# Altium PCB PCB.PcbDoc (part 10 of 11)
Units mm, origin at the board's own origin, x right, y up, seen from the top; angles counter-clockwise.
Board outline 100.46 x 70.51 mm, 10 copper layers (L1(SIG), L2(GND), L3(PWR), L4(SIG), L5(GND), L6(SIG), L7(GND), L8(SIG), L9(GND), L10(SIG)), stack 1.49 mm thick; 425 components, 324 nets, 2004 pads, 1425 vias.
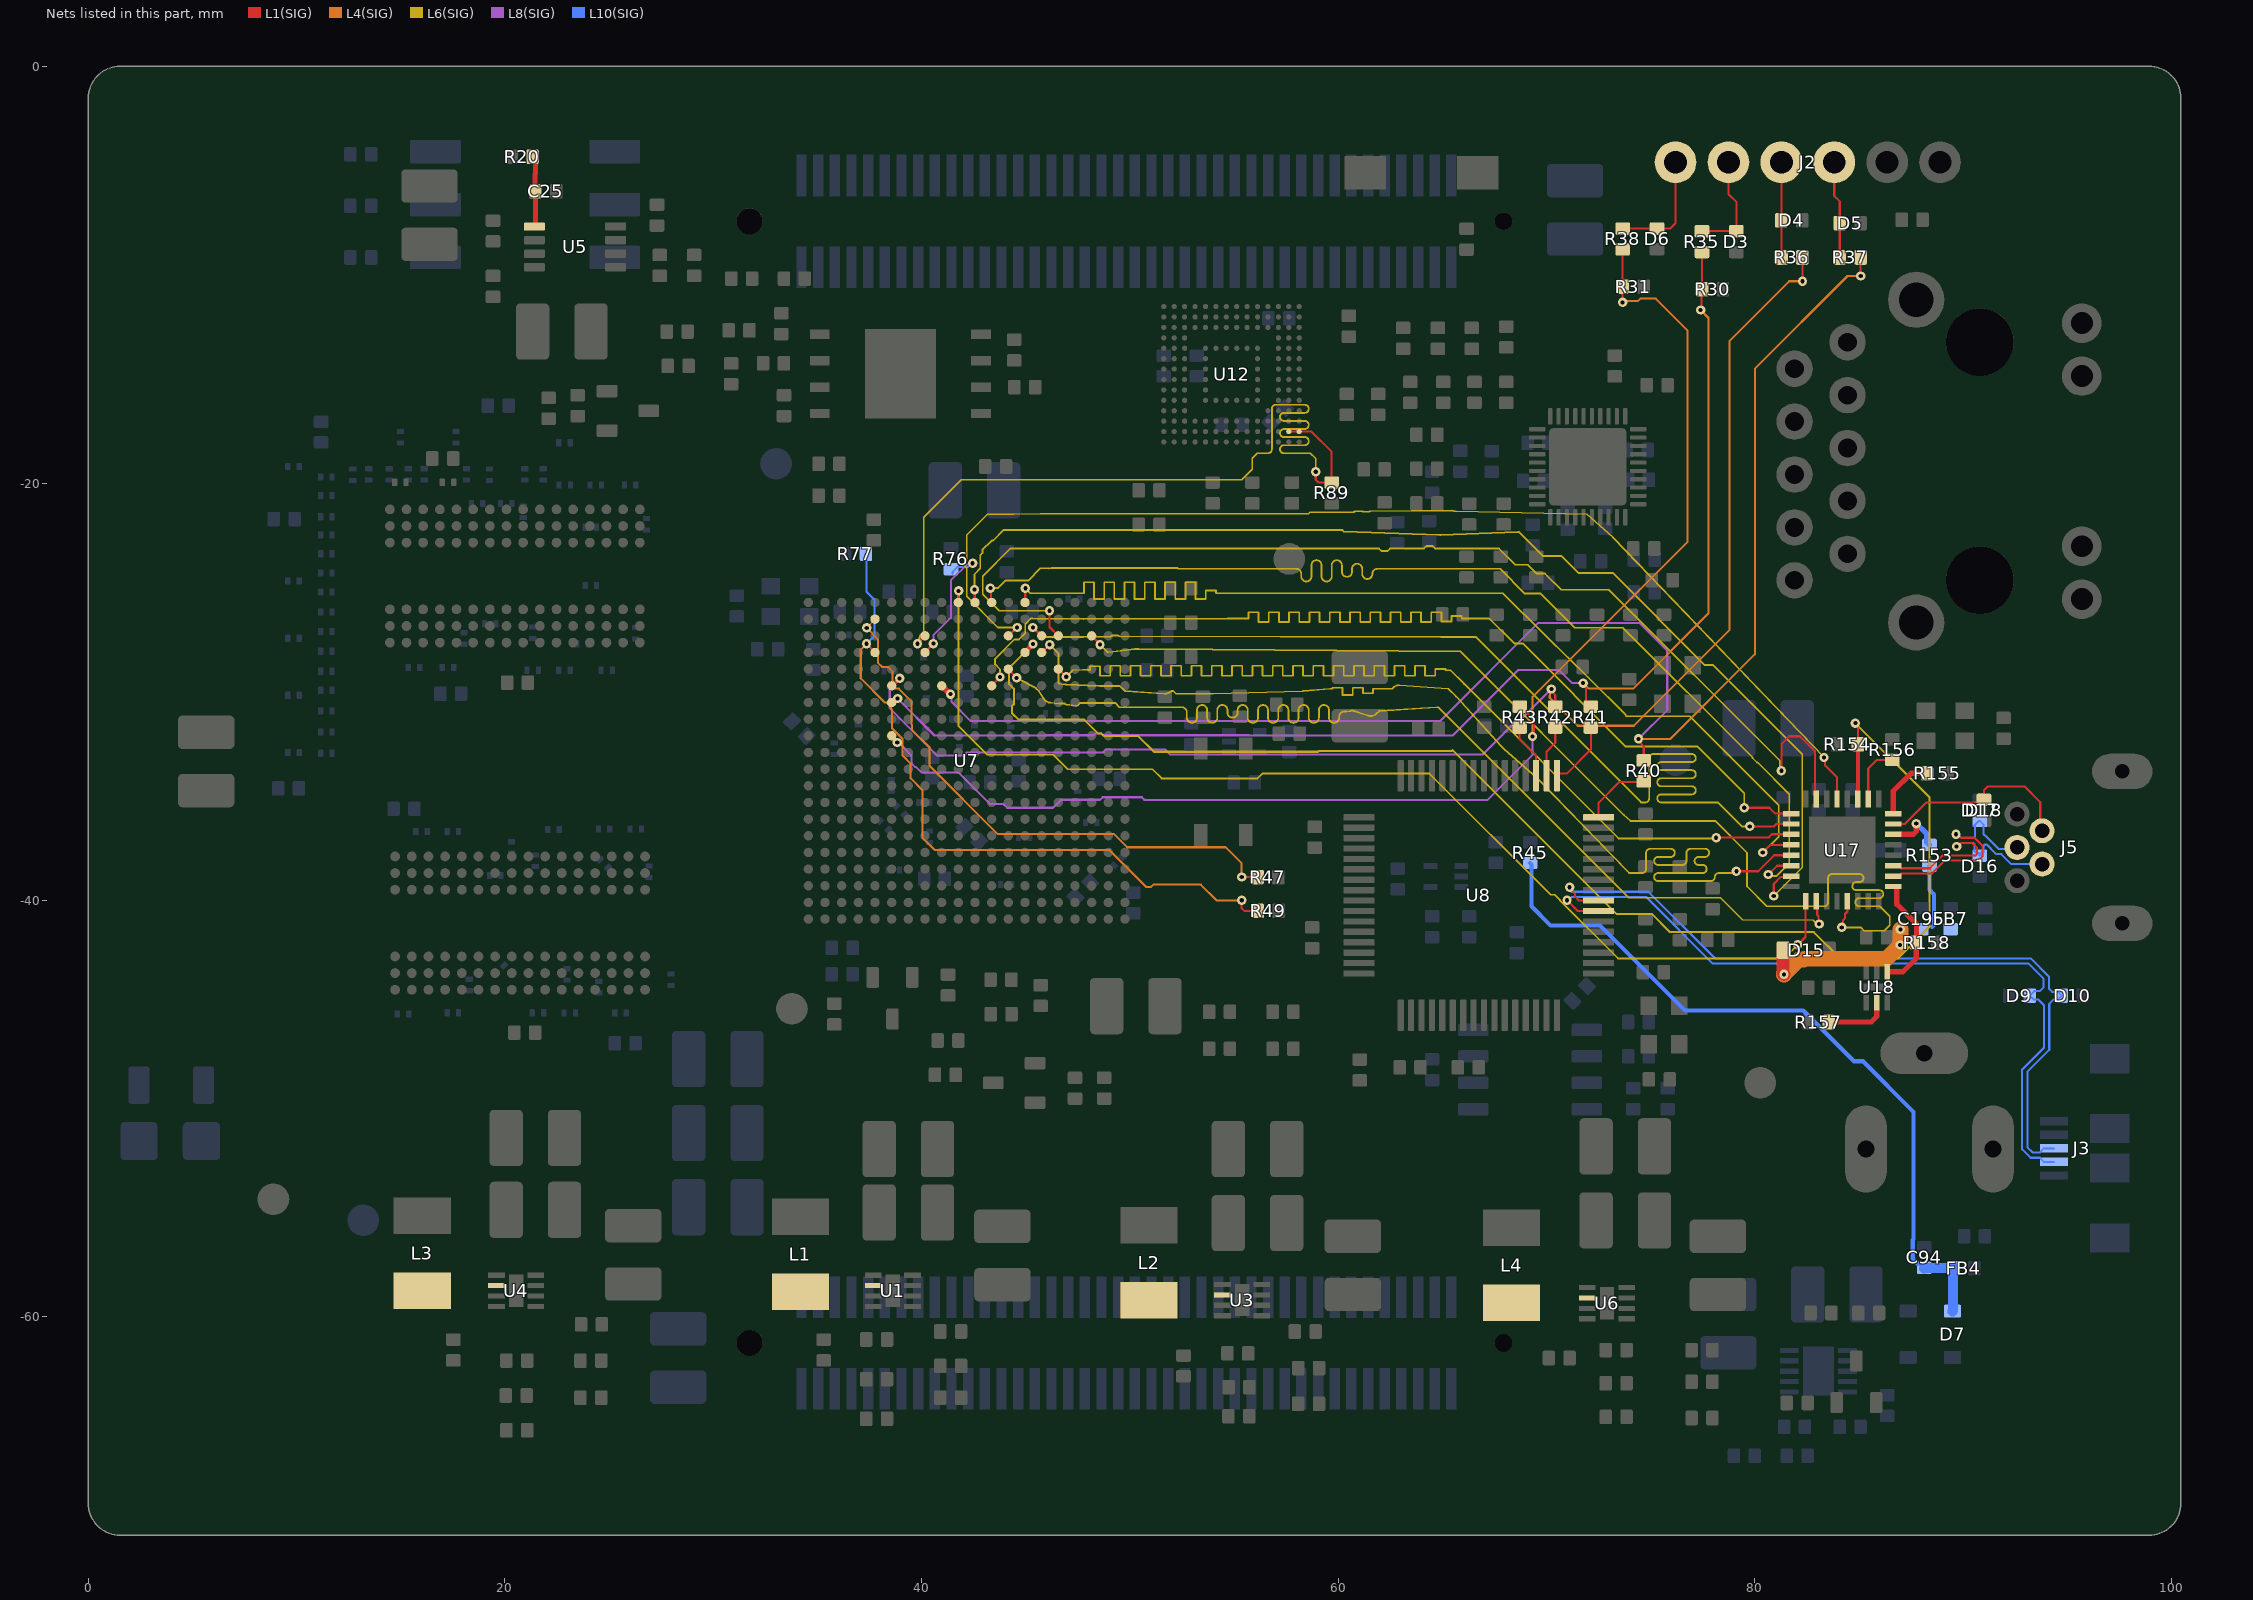
[diagram p17: the nets of this part, all layers, seen from the top]

## Via types
v1: diameter 0.45, hole 0.2, L1(SIG) to L10(SIG), tented both sides, 1194 vias
v2: diameter 0.45, hole 0.2, L1(SIG) to L10(SIG), 211 vias
v3: diameter 0.6, hole 0.25, L1(SIG) to L10(SIG), 9 vias
v4: diameter 0, hole 0.2, L1(SIG) to L10(SIG), tented both sides, 6 vias
v5: diameter 5, hole 3.2, L1(SIG) to L10(SIG), tented both sides, 4 vias
v6: diameter 0.45/0.45/0.45/0.45/0.45/0.45/0.45/0.45/0.45/0.45 (per signal layer), hole 0.2, L1(SIG) to L10(SIG), tented both sides, 1 vias

## Nets (pads, with @x,y where several pads share a name; then routed paths per layer and width w, separated by ;. In a path a pad name is that pad's centre, name@x,y a point inside that pad or via, vN(x,y) a via of type N, cw(c..) or ccw(c..) an arc to the next point about the centre after c; other vN are vias at no path point) (continued)
SD_D3: R89.2 U7.C8 U12.B1 U12.B2 | length 44.7
  L1(SIG) w0.103: v1(39.811,-27.693) 39.811,-27.681 40.17,-27.322 U7.C8@40.17,-27.31 ; U12.B2@57.634,-17.506 58.025,-17.506 U12.B1@58.08,-17.56 ; U12.B1@58.134,-17.506 58.716,-17.506 59.69,-18.479 R89.2@59.69,-19.951 59.063,-19.951 58.928,-19.816 v1(58.928,-19.435)
  L6(SIG) w0.088: v1(39.811,-27.693) 39.954,-27.269 40.111,-27.112 40.111,-21.614 41.91,-19.816 55.372,-19.816 55.88,-19.308 55.88,-18.78 56.114,-18.546 56.585,-18.546 56.629,-18.546 ccw(c56.629,-18.352) 56.823,-18.352 56.823,-16.414 cw(c57.016,-16.414) 57.016,-16.22 58.399,-16.22 cw(c58.399,-16.414) 58.593,-16.414 cw(c58.399,-16.414) 58.399,-16.608 57.404,-16.608 ccw(c57.404,-16.801) 57.21,-16.801 ccw(c57.404,-16.801) 57.404,-16.995 58.399,-16.995 cw(c58.399,-17.189) 58.593,-17.189 cw(c58.399,-17.189) 58.399,-17.383 57.404,-17.383 ccw(c57.404,-17.577) 57.21,-17.577 ccw(c57.404,-17.577) 57.404,-17.77 58.399,-17.77 cw(c58.399,-17.964) 58.593,-17.964 cw(c58.399,-17.964) 58.399,-18.158 57.404,-18.158 ccw(c57.404,-18.352) 57.21,-18.352 ccw(c57.404,-18.352) 57.404,-18.546 58.637,-18.546 58.674,-18.546 58.928,-18.8 v1(58.928,-19.435)
SW_1V0: L1.1 U1.6
SW_1V8: L2.1 U3.6
SW_1V35: L3.1 U4.6
SW_3V3: L4.1 U6.6
TCK: R37.2 R40.2 U7.F9 | length 73
  L1(SIG) w0.1: v1(74.422,-32.258) 74.422,-32.351 74.676,-32.605 R40.2@74.676,-33.294 ; v1@85.086,-10.033 R37.2@85.086,-9.152
  L1(SIG) w0.3: U7.F9@40.973,-29.708 40.979,-29.708 41.381,-30.11 v1(41.393,-30.11) ; R37.2@85.082,-9.148 R37.2@85.086,-9.152 ; v1@85.086,-10.033 v1(85.09,-10.037)
  L4(SIG) w0.1: v1(74.422,-32.258) 74.425,-32.262 75.946,-32.262 80.01,-28.198 80.01,-14.482 84.455,-10.037 v1(85.09,-10.037)
  L8(SIG) w0.1: v1(41.393,-30.11) 41.442,-30.159 41.442,-30.485 42.367,-31.41 64.892,-31.41 69.616,-26.686 74.468,-26.686 75.804,-28.021 75.804,-30.877 v1(74.422,-32.258)
TCK_FTDI: R40.1 U8.16 | length 3.6
  L1(SIG) w0.1: U8.16@72.506,-36.023 72.506,-35.42 72.506,-35.321 73.5,-34.326 74.795,-34.326 R40.1@74.947,-34.175
TCK_JTAG: D5.K J2.4 R37.1 | length 4.7
  L1(SIG) w0.1: J2.4@83.82,-4.576 83.82,-6.195 84.082,-6.457 R37.1@84.082,-9.148
TDI: R30.1 R35.2 R41.2 U7.G6 | length 62.1
  L1(SIG) w0.1: v1(71.765,-29.583) 71.765,-29.678 71.911,-29.824 71.911,-30.487 R41.2@72.136,-30.712 ; v1(77.403,-11.67) 77.44,-11.633 77.44,-10.709 R30.1@77.478,-10.672 77.474,-10.668 77.474,-8.89 R35.2@77.47,-8.886
  L1(SIG) w0.2: U7.G6@38.57,-30.51 38.616,-30.51 38.808,-30.318 v1(38.855,-30.318)
  L4(SIG) w0.1: v1(71.765,-29.583) 72.03,-29.849 74.168,-29.849 77.784,-26.233 77.784,-12.051 v1(77.403,-11.67)
  L8(SIG) w0.1: v1(38.855,-30.318) 38.855,-30.325 40.628,-32.098 45.928,-32.098 45.942,-32.085 48.255,-32.085 48.335,-32.004 48.646,-32.004 48.726,-32.085 55.714,-32.085 55.728,-32.098 65.499,-32.098 68.638,-28.96 70.612,-28.96 71.235,-29.583 v1(71.765,-29.583)
TDI_FTDI: R41.1 U8.17 | length 3.2
  L1(SIG) w0.1: U8.17@70.506,-34.023 70.506,-33.963 70.556,-33.913 70.993,-33.913 72.136,-32.77 R41.1@72.136,-31.712
TDI_JTAG: D3.K J2.2 R35.1 | length 5.1
  L1(SIG) w0.1: R35.1@77.47,-7.886 D3.K@79.121,-7.886 79.121,-6.481 78.74,-6.1 J2.2@78.74,-4.576
TDO: R36.2 R42.2 U7.F6 | length 68.6
  L1(SIG) w0.1: v1(70.24,-29.862) 70.24,-29.956 70.427,-30.143 R42.2@70.427,-30.712 ; v1@82.292,-10.287 R36.2@82.292,-9.152
  L1(SIG) w0.2: U7.F6@38.57,-29.71 38.582,-29.71 38.94,-29.352 v1(38.952,-29.352) ; R36.2@82.288,-9.148 R36.2@82.292,-9.152 ; v1@82.292,-10.287 v1(82.296,-10.291)
  L4(SIG) w0.1: v1(70.24,-29.862) 70.173,-29.929 70.173,-30.174 70.161,-30.187 70.161,-30.287 71.503,-31.628 74.194,-31.628 78.798,-27.024 78.798,-13.153 81.661,-10.291 v1(82.296,-10.291)
  L8(SIG) w0.1: v1(38.952,-29.352) 38.952,-29.392 38.48,-29.864 38.48,-30.784 40.762,-33.066 42.03,-33.066 42.184,-32.912 48.715,-32.912 48.852,-32.776 51.717,-32.776 51.955,-33.014 66.934,-33.014 68.476,-31.471 68.631,-31.471 v1(70.24,-29.862)
TDO_FTDI: R42.1 U8.18 | length 2.5
  L1(SIG) w0.1: U8.18@70.006,-34.023 70.006,-32.868 70.427,-32.446 R42.1@70.427,-31.712
TDO_JTAG: D4.K J2.3 R36.1 | length 4.5
  L1(SIG) w0.1: R36.1@81.28,-8.878 D4.K@81.28,-7.37 J2.3@81.28,-4.576
  L1(SIG) w0.2: R36.1@81.28,-9.132 R36.1@81.423,-9.275
TMS: R31.1 R38.2 R43.2 U7.J6 | length 65.2
  L1(SIG) w0.1: R43.2@68.719,-30.712 68.769,-30.712 69.402,-31.346 69.402,-32.078 v1(69.337,-32.143) ; v1(73.66,-11.303) 73.66,-10.553 R31.1@73.668,-10.545 73.664,-10.541 73.664,-8.763 R38.2@73.66,-8.759
  L1(SIG) w0.2: U7.J6@38.57,-32.11 38.57,-32.135 38.838,-32.403 v1(38.838,-32.429)
  L4(SIG) w0.1: v1(69.337,-32.143) 69.337,-30.235 76.784,-22.787 76.784,-12.657 75.254,-11.126 74.515,-11.126 74.395,-11.246 73.717,-11.246 v1(73.66,-11.303)
  L8(SIG) w0.1: v1(38.838,-32.429) 38.912,-32.429 39.525,-33.042 39.525,-33.398 39.535,-33.408 39.535,-33.452 39.681,-33.598 39.728,-33.598 40.009,-33.88 41.792,-33.88 43.307,-35.394 43.939,-35.394 44.11,-35.565 46.317,-35.565 46.7,-35.182 48.576,-35.182 48.699,-35.06 50.574,-35.06 50.697,-35.182 50.718,-35.182 50.734,-35.198 67.168,-35.198 69.337,-33.029 v1(69.337,-32.143)
TMS_FTDI: R43.1 U8.19 | length 2.6
  L1(SIG) w0.1: R43.1@68.719,-31.712 68.719,-32.273 69.506,-33.06 U8.19@69.506,-34.023
TMS_JTAG: D6.K J2.1 R38.1 | length 5.6
  L1(SIG) w0.1: R38.1@73.66,-7.759 75.938,-7.759 76.2,-7.497 J2.1@76.2,-4.576
UART1_RX: R47.2 U7.B5 | length 27.2
  L1(SIG) w0.1: v1@37.37,-26.921 U7.B5@37.832,-26.459 ; v1(55.372,-38.892) R47.2@56.134,-38.892
  L1(SIG) w0.254: U7.B5@37.832,-26.459 U7.B5@37.847,-26.459
  L4(SIG) w0.1: v1(37.37,-26.932) 37.909,-27.471 37.909,-28.602 38.116,-28.809 38.397,-28.809 38.604,-29.016 38.604,-29.721 38.722,-29.84 38.776,-29.84 38.779,-29.843 38.91,-29.843 39.517,-30.45 39.517,-31.563 39.543,-31.588 39.543,-31.813 40.378,-32.648 40.378,-33.536 43.671,-36.83 49.249,-36.83 49.879,-37.46 54.601,-37.46 55.372,-38.231 v1(55.372,-38.892)
UART1_TX_VCFG1: R49.2 R77.2 U7.D5 | length 33.8
  L1(SIG) w0.1: v1(37.363,-27.694) 37.363,-27.698 37.77,-28.106 U7.D5@37.77,-28.11 ; v1(55.372,-40.009) 55.372,-40.39 55.499,-40.517 R49.2@56.142,-40.517
  L4(SIG) w0.1: v1(37.363,-27.694) 37.084,-27.973 37.084,-29.356 38.24,-30.512 38.325,-30.512 38.545,-30.732 38.545,-30.817 38.588,-30.86 38.588,-31.75 39.088,-32.25 39.088,-33.051 39.482,-33.445 39.482,-34.152 40.049,-34.72 40.049,-37.005 40.636,-37.592 49.022,-37.592 50.798,-39.368 51.016,-39.368 51.131,-39.253 53.41,-39.253 54.166,-40.009 v1(55.372,-40.009)
  L10(SIG) w0.1: R77.2@37.33,-23.372 37.37,-23.412 37.37,-25.205 37.745,-25.58 37.745,-27.312 v1@37.363,-27.694
USB_CLK: U7.F12 U17.1 | length 54.7
  L1(SIG) w0.103: U7.F12@43.37,-29.71 43.37,-29.698 43.77,-29.298 v1(43.77,-29.287) ; v1(79.502,-35.564) 80.697,-35.564 80.979,-35.846 U17.1@81.751,-35.846
  L6(SIG) w0.088: v1(43.77,-29.287) 43.77,-28.916 43.537,-28.684 43.537,-28.411 44.46,-27.488 44.679,-27.488 44.979,-27.189 44.979,-26.757 45.231,-26.504 45.257,-26.478 45.33,-26.478 47.767,-26.501 ccw(c47.77,-26.132) 47.771,-26.501 54.687,-26.478 ; 54.689,-26.478 55.653,-26.478 55.697,-26.478 55.697,-26.183 56.185,-26.183 56.185,-26.653 56.672,-26.653 56.672,-26.183 57.16,-26.183 57.16,-26.653 57.647,-26.653 57.647,-26.183 58.135,-26.183 58.135,-26.653 58.623,-26.653 58.623,-26.183 59.11,-26.183 59.11,-26.653 59.598,-26.653 59.598,-26.183 60.085,-26.183 60.085,-26.653 60.573,-26.653 60.573,-26.183 61.061,-26.183 61.061,-26.653 61.548,-26.653 61.548,-26.183 62.036,-26.183 62.036,-26.653 62.523,-26.653 62.523,-26.183 63.011,-26.183 63.011,-26.653 63.498,-26.653 63.498,-26.183 63.986,-26.183 63.986,-26.653 64.474,-26.653 64.474,-26.183 64.961,-26.183 64.961,-26.626 65.449,-26.626 65.449,-26.352 65.936,-26.352 65.936,-26.478 66.428,-26.478 67.256,-26.478 68.455,-27.677 68.858,-27.677 73.807,-32.627 77.262,-32.627 79.502,-34.867 v1(79.502,-35.564)
USB_DATA0: U7.E16 U17.3 | length 55.4
  L1(SIG) w0.103: U7.E16@46.57,-28.91 46.575,-28.91 46.945,-29.279 v1(46.95,-29.279) ; v1(78.147,-37.004) 78.161,-36.99 80.673,-36.99 80.823,-36.84 81.745,-36.84 U17.3@81.751,-36.846
  L6(SIG) w0.088: v1(46.95,-29.279) 46.95,-29.264 47.229,-28.985 47.254,-28.96 47.739,-28.944 cw(c47.752,-29.312) 47.758,-28.943 47.989,-28.947 48.033,-28.948 48.084,-28.948 48.084,-28.77 48.572,-28.77 48.572,-29.23 49.059,-29.23 49.059,-28.746 49.547,-28.746 49.547,-29.23 50.035,-29.23 50.035,-28.746 50.522,-28.746 50.522,-29.23 51.01,-29.23 51.01,-28.746 51.497,-28.746 51.497,-29.23 51.985,-29.23 51.985,-28.746 52.472,-28.746 52.472,-29.23 52.96,-29.23 52.96,-28.746 53.448,-28.746 53.448,-29.23 53.935,-29.23 53.935,-28.746 54.423,-28.746 54.423,-29.23 54.91,-29.23 54.91,-28.746 55.398,-28.746 55.398,-29.23 55.886,-29.23 55.886,-28.746 56.373,-28.746 56.373,-29.23 56.861,-29.23 56.861,-28.746 57.348,-28.746 57.348,-29.23 57.836,-29.23 57.836,-28.746 58.323,-28.746 58.323,-29.23 58.811,-29.23 58.811,-28.746 59.299,-28.746 59.299,-29.23 59.786,-29.23 59.786,-28.746 60.274,-28.746 60.274,-29.23 60.761,-29.23 60.761,-28.746 61.249,-28.746 61.249,-29.23 61.737,-29.23 61.737,-28.746 62.224,-28.746 62.224,-29.23 62.712,-29.23 62.712,-28.746 63.199,-28.746 63.199,-29.23 63.687,-29.23 63.687,-28.746 64.174,-28.746 64.174,-29.23 64.662,-29.23 64.662,-28.906 65.15,-28.906 65.15,-28.965 65.352,-28.965 65.396,-28.965 66.049,-29.618 ; 66.05,-29.619 73.47,-37.039 73.79,-37.039 73.825,-37.039 78.112,-37.039 v1(78.147,-37.004)
USB_DATA1: U7.A14 U17.4 | length 55.2
  L1(SIG) w0.103: U7.A14@44.97,-25.71 44.979,-25.7 44.979,-25.036 v1(44.988,-25.027) ; v1(80.391,-37.713) 80.759,-37.346 U17.4@81.751,-37.346
  L6(SIG) w0.088: v1(44.988,-25.027) 45.23,-25.268 47.752,-25.268 47.796,-25.268 47.796,-24.741 48.283,-24.741 48.283,-25.541 48.771,-25.541 48.771,-24.741 49.259,-24.741 49.259,-25.541 49.746,-25.541 49.746,-24.741 50.234,-24.741 50.234,-25.541 50.721,-25.541 50.721,-24.741 51.209,-24.741 51.209,-25.541 51.696,-25.541 51.696,-24.741 52.184,-24.741 52.184,-25.541 52.672,-25.541 52.672,-24.741 53.159,-24.741 53.159,-25.541 53.647,-25.541 53.647,-25.129 54.134,-25.129 54.134,-25.268 56.022,-25.268 67.907,-25.268 69.996,-27.336 72.023,-29.319 73.811,-31.107 73.811,-31.172 73.847,-31.172 76.888,-31.172 81.153,-35.437 81.153,-36.961 80.4,-37.713 v1(80.391,-37.713)
USB_DATA2: U7.D15 U17.5 | length 54.9
  L1(SIG) w0.103: U7.D15@45.77,-28.11 45.772,-28.11 46.15,-27.732 v1(46.152,-27.732) ; v1(79.121,-38.612) 80.175,-38.612 80.939,-37.848 81.749,-37.848 U17.5@81.751,-37.846
  L6(SIG) w0.088: v1(46.152,-27.732) 46.572,-28.152 46.572,-29.521 46.572,-29.558 46.623,-29.609 46.902,-29.645 ccw(c46.95,-29.279) 46.914,-29.646 ccw(c46.95,-29.279) 46.934,-29.648 48.557,-29.718 ccw(c48.561,-29.631) 48.561,-29.718 cw(c48.57,-30.087) 48.579,-29.718 cw(c48.57,-30.087) 48.622,-29.722 48.626,-29.718 49.523,-29.718 49.738,-29.934 49.764,-29.959 51.664,-30.09 ccw(c51.689,-29.722) 51.873,-30.041 52.015,-29.959 52.088,-29.959 52.219,-30.09 53.973,-30.09 54.01,-30.09 58.283,-29.968 cw(c58.285,-30.055) 58.286,-29.968 ; 58.286,-29.968 ccw(c58.293,-29.599) 58.29,-29.968 ccw(c58.293,-29.599) 58.327,-29.966 59.614,-29.849 59.687,-29.849 59.731,-29.849 59.731,-29.8 60.218,-29.8 60.218,-30.151 60.706,-30.151 60.706,-29.8 61.194,-29.8 61.194,-30.071 61.681,-30.071 61.681,-29.849 62.608,-29.849 cw(c62.917,-30.05) 62.944,-29.682 65.292,-29.849 65.666,-30.223 cw(c65.405,-30.484) 65.669,-30.226 67.828,-32.613 67.971,-32.756 69.535,-34.128 69.536,-34.129 73.933,-38.648 73.984,-38.699 74.02,-38.699 74.549,-38.699 74.593,-38.699 ccw(c74.593,-38.505) 74.787,-38.505 74.787,-37.73 cw(c74.98,-37.73) 74.98,-37.536 75.97,-37.536 cw(c75.97,-37.73) 76.164,-37.73 cw(c75.97,-37.73) 75.97,-37.924 75.368,-37.924 ccw(c75.368,-38.117) 75.174,-38.117 ccw(c75.368,-38.117) 75.368,-38.311 76.531,-38.311 ccw(c76.531,-38.117) 76.725,-38.117 76.725,-37.73 cw(c76.918,-37.73) 76.918,-37.536 77.621,-37.536 cw(c77.621,-37.73) 77.815,-37.73 cw(c77.621,-37.73) 77.621,-37.924 77.306,-37.924 ccw(c77.306,-38.117) 77.112,-38.117 ccw(c77.306,-38.117) 77.306,-38.311 77.503,-38.311 cw(c77.503,-38.505) 77.696,-38.505 cw(c77.503,-38.505) 77.503,-38.699 75.368,-38.699 ccw(c75.368,-38.892) 75.174,-38.892 ccw(c75.368,-38.892) 75.368,-39.086 77.89,-39.086 ccw(c77.89,-38.892) 78.084,-38.892 cw(c78.278,-38.892) 78.278,-38.699 78.322,-38.699 78.888,-38.699 78.906,-38.681 79.052,-38.681 v1(79.121,-38.612)
USB_DATA3: U7.A12 U17.6 | length 54.6
  L1(SIG) w0.103: v1(43.307,-25.023) 43.339,-25.054 43.339,-25.678 U7.A12@43.37,-25.71 ; v1(80.654,-38.769) 81.077,-38.346 U17.6@81.751,-38.346
  L6(SIG) w0.088: v1(43.307,-25.023) 43.664,-25.023 44.028,-24.658 45.121,-24.658 45.712,-24.068 46.178,-24.068 ; 46.107,-24.079 46.178,-24.068 ; v1(80.654,-38.769) 80.723,-38.838 81.054,-38.838 81.661,-38.231 81.661,-34.915 80.138,-33.392 80.111,-33.392 79.895,-33.176 79.895,-33.149 73.67,-26.924 71.371,-26.924 69.731,-25.284 68.969,-25.284 67.777,-24.092 64.65,-24.092 61.89,-24.092 ccw(c61.89,-24.336) 61.646,-24.336 cw(c61.402,-24.336) 61.402,-24.58 cw(c61.402,-24.336) 61.158,-24.336 61.158,-24.092 ccw(c60.915,-24.092) 60.915,-23.848 ccw(c60.915,-24.092) 60.671,-24.092 60.671,-24.235 cw(c60.427,-24.235) 60.427,-24.478 cw(c60.427,-24.235) 60.183,-24.235 60.183,-23.921 ccw(c59.939,-23.921) 59.939,-23.677 ccw(c59.939,-23.921) 59.696,-23.921 59.696,-24.457 cw(c59.452,-24.457) 59.452,-24.701 cw(c59.452,-24.457) 59.208,-24.457 59.208,-23.921 ccw(c58.964,-23.921) 58.964,-23.677 ccw(c58.964,-23.921) 58.72,-23.921 58.72,-24.457 cw(c58.477,-24.457) 58.477,-24.701 cw(c58.477,-24.457) 58.233,-24.457 58.233,-24.336 ccw(c57.989,-24.336) 57.989,-24.092 57.458,-24.092 52.335,-24.092 52.291,-24.047 46.332,-24.047 46.275,-24.047 46.25,-24.056 46.178,-24.068
USB_DATA4: U7.A11 U17.7 | length 55.9
  L1(SIG) w0.103: v1(42.545,-25.093) 42.557,-25.105 42.557,-25.697 U7.A11@42.57,-25.71 ; v1(80.916,-39.802) 80.916,-39.223 81.256,-38.883 81.713,-38.883 U17.7@81.751,-38.846
  L6(SIG) w0.088: v1(42.545,-25.093) 42.545,-24.355 42.823,-24.077 42.823,-23.438 42.927,-23.335 42.927,-23.181 43.371,-22.737 43.434,-22.737 43.952,-22.219 43.962,-22.229 60.198,-22.229 60.274,-22.305 64.884,-22.47 ccw(c64.897,-22.102) 64.911,-22.47 68.623,-22.33 68.695,-22.33 69.85,-23.485 70.734,-23.485 71.54,-24.291 73.182,-24.291 77.609,-28.717 78.003,-28.717 82.286,-33 82.286,-38.432 v1(80.916,-39.802)
USB_DATA5: U7.A10 U17.9 | length 54.7
  L1(SIG) w0.103: U7.A10@41.77,-25.71 41.776,-25.703 41.776,-25.159 v1(41.783,-25.152) ; v1(82.065,-42.138) 82.069,-42.138 82.437,-41.77 82.437,-40.06 U17.9@82.451,-40.046
  L6(SIG) w0.088: v1(41.783,-25.152) 41.783,-31.656 43.15,-33.023 46.335,-33.023 47.03,-33.718 51.09,-33.718 51.526,-34.154 56.133,-34.154 56.362,-33.925 64.389,-33.925 70.209,-39.744 70.406,-39.744 70.649,-39.988 70.649,-40.009 73.442,-42.803 81.404,-42.803 82.065,-42.142 v1(82.065,-42.138)
USB_DATA6: U7.E13 U17.10 | length 54.8
  L1(SIG) w0.103: U7.E13@44.17,-28.91 44.17,-28.921 44.57,-29.321 v1(44.57,-29.332) ; U17.10@82.951,-40.046 83.006,-40.101 83.006,-40.712 83.058,-40.764 83.058,-41.11 v1(83.092,-41.144)
  L6(SIG) w0.088: v1(44.57,-29.332) 45.493,-29.818 45.636,-29.961 45.925,-30.404 ccw(c45.992,-30.348) 45.93,-30.41 45.934,-30.414 ccw(c46.162,-30.124) 45.998,-30.454 46.109,-30.51 ccw(c46.148,-30.431) 46.148,-30.519 46.15,-30.519 cw(c46.17,-30.887) 46.214,-30.521 46.605,-30.568 ; 46.606,-30.568 ccw(c46.616,-30.481) 46.667,-30.552 46.868,-30.552 46.901,-30.585 ccw(c46.963,-30.523) 46.951,-30.61 ; 46.952,-30.61 47.419,-30.666 47.488,-30.666 47.513,-30.64 47.624,-30.53 49.295,-30.53 49.503,-30.738 50.235,-30.738 52.495,-30.738 cw(c52.495,-30.981) 52.739,-30.981 52.739,-31.245 ccw(c52.983,-31.245) 52.983,-31.489 ccw(c52.983,-31.245) 53.227,-31.245 53.227,-30.877 cw(c53.471,-30.877) 53.471,-30.633 cw(c53.471,-30.877) 53.714,-30.877 53.714,-31.245 ccw(c53.958,-31.245) 53.958,-31.489 ccw(c53.958,-31.245) 54.202,-31.245 54.202,-30.877 cw(c54.446,-30.877) 54.446,-30.633 cw(c54.446,-30.877) 54.69,-30.877 54.69,-30.996 ccw(c54.933,-30.996) 54.933,-31.239 ccw(c54.933,-30.996) 55.177,-30.996 55.177,-30.877 cw(c55.421,-30.877) 55.421,-30.633 cw(c55.421,-30.877) 55.665,-30.877 55.665,-31.245 ccw(c55.908,-31.245) 55.908,-31.489 ccw(c55.908,-31.245) 56.152,-31.245 56.152,-30.877 cw(c56.396,-30.877) 56.396,-30.633 cw(c56.396,-30.877) 56.64,-30.877 56.64,-31.245 ccw(c56.884,-31.245) 56.884,-31.489 ccw(c56.884,-31.245) 57.127,-31.245 57.127,-30.877 cw(c57.371,-30.877) 57.371,-30.633 cw(c57.371,-30.877) 57.615,-30.877 57.615,-31.245 ccw(c57.859,-31.245) 57.859,-31.489 ccw(c57.859,-31.245) 58.103,-31.245 58.103,-30.877 cw(c58.346,-30.877) 58.346,-30.633 cw(c58.346,-30.877) 58.59,-30.877 58.59,-31.245 ccw(c58.834,-31.245) 58.834,-31.489 ccw(c58.834,-31.245) 59.078,-31.245 59.078,-30.877 cw(c59.322,-30.877) 59.322,-30.633 cw(c59.322,-30.877) 59.565,-30.877 59.565,-31.245 ccw(c59.809,-31.245) 59.809,-31.489 ccw(c59.809,-31.245) 60.053,-31.245 60.053,-31.187 cw(c60.297,-31.187) 60.314,-30.944 60.414,-30.951 60.591,-30.92 60.645,-30.896 60.696,-30.896 61.394,-31.128 61.438,-31.142 61.451,-31.147 ccw(c61.568,-30.797) 61.824,-31.062 61.967,-30.924 ccw(c61.951,-30.555) 61.976,-30.923 64.736,-30.738 64.804,-30.738 73.948,-39.882 78.359,-39.882 79.39,-40.913 79.416,-40.938 82.813,-40.964 82.994,-41.144 v1(83.092,-41.144)
USB_DATA7: U7.C18 U17.13 | length 55.2
  L1(SIG) w0.103: U7.C18@48.17,-27.31 48.17,-27.321 48.57,-27.721 v1(48.57,-27.732) ; v1(84.18,-41.308) 84.246,-41.242 84.246,-40.964 84.334,-40.877 84.334,-40.668 84.453,-40.549 84.453,-40.048 U17.13@84.451,-40.046
  L6(SIG) w0.088: v1(48.57,-27.732) 48.916,-28.078 48.941,-28.103 48.989,-28.103 50.258,-27.95 cw(c50.302,-28.316) 50.312,-27.947 50.388,-27.949 cw(c50.428,-28.316) 50.43,-27.947 53.973,-27.97 65.878,-28.071 65.904,-28.096 73.72,-35.912 74.041,-36.199 74.077,-36.199 78.105,-36.199 79.632,-37.725 79.632,-39.342 80.584,-40.294 83.286,-40.294 83.33,-40.294 ccw(c83.33,-40.101) 83.523,-40.101 83.523,-38.938 cw(c83.717,-38.938) 83.717,-38.744 85.033,-38.744 cw(c85.033,-38.938) 85.227,-38.938 cw(c85.033,-38.938) 85.033,-39.132 84.88,-39.132 ccw(c84.88,-39.326) 84.686,-39.326 ccw(c84.88,-39.326) 84.88,-39.519 85.978,-39.519 cw(c85.978,-39.713) 86.171,-39.713 cw(c85.978,-39.713) 85.978,-39.907 85.026,-39.907 ccw(c85.026,-40.101) 84.832,-40.101 ccw(c85.026,-40.101) 85.026,-40.294 85.931,-40.294 cw(c85.931,-40.488) 86.067,-40.35 86.102,-40.386 86.133,-40.417 86.487,-40.771 86.487,-41.212 86.228,-41.471 85.249,-41.471 85.087,-41.308 v1(84.18,-41.308)
USB_DIR: U7.C16 U17.31 | length 55.2
  L1(SIG) w0.103: v1(46.147,-26.11) 46.147,-26.887 U7.C16@46.57,-27.31 ; v1(81.28,-33.786) 81.28,-32.516 81.661,-32.135 82.169,-32.135 82.901,-32.867 82.901,-35.096 U17.31@82.951,-35.146
  L6(SIG) w0.088: v1(46.147,-26.11) 43.729,-26.11 42.938,-25.319 42.938,-24.441 44.261,-23.118 61.962,-23.118 62.077,-23.232 62.383,-23.232 62.498,-23.118 64.121,-23.118 64.236,-23.003 64.542,-23.003 64.657,-23.118 67.719,-23.118 68.502,-23.9 69.11,-23.9 69.535,-24.326 69.933,-24.326 70.704,-25.097 72.998,-25.097 81.223,-33.322 81.223,-33.728 v1(81.28,-33.786)
USB_FTDI_D_N: D9.K J3.2 U8.7 | length 37.6
  L1(SIG) w0.1: v1(70.993,-40.009) 71.507,-40.523 72.467,-40.523 U8.7@72.506,-40.523 U8.7@72.467,-40.484
  L10(SIG) w0.1: v1(70.993,-40.009) 71.065,-40.009 71.227,-39.847 74.794,-39.847 77.994,-43.047 93.152,-43.047 93.874,-43.77 93.874,-44.176 93.681,-44.369 93.422,-44.369 D9.K@93.21,-44.581 93.398,-44.768 93.614,-44.768 93.891,-45.046 93.891,-47.082 92.841,-48.133 92.841,-51.962 93.246,-52.367 93.686,-52.367 93.886,-52.567 J3.2@94.361,-52.567
USB_FTDI_D_P: D10.K J3.3 U8.8 | length 37.5
  L1(SIG) w0.1: v1(71.114,-39.382) 71.114,-39.452 71.38,-39.717 71.38,-39.835 71.567,-40.023 U8.8@72.506,-40.023
  L10(SIG) w0.1: v1(71.114,-39.382) 71.114,-39.477 71.213,-39.576 71.213,-39.597 74.897,-39.597 78.097,-42.797 93.255,-42.797 94.124,-43.666 94.124,-44.244 94.28,-44.4 94.569,-44.4 D10.K@94.75,-44.581 94.567,-44.763 94.359,-44.763 94.141,-44.981 94.141,-47.186 93.091,-48.236 93.091,-51.858 93.35,-52.117 93.686,-52.117 93.886,-51.917 J3.3@94.361,-51.917
USB_HS_CPEN: R158.1 U17.17 U18.4 | length 5.7
  L1(SIG) w0.254: U18.4@86.36,-43.438 87.122,-43.438 87.757,-42.803 87.757,-42.049 R158.1@87.765,-42.041 87.765,-41.14 86.824,-40.199 86.824,-39.349 86.821,-39.346 U17.17@86.651,-39.346
USB_HS_D_N: D16.K J5.2 U17.19 | length 11.4
  L1(SIG) w0.1: U17.19@86.651,-38.346 86.921,-38.346 87.046,-38.471 88.404,-38.471 89.025,-37.85 90.619,-37.85 90.678,-37.791 90.678,-37.483 90.449,-37.254 89.93,-37.254 89.759,-37.424 v1(89.696,-37.424)
  L10(SIG) w0.1: v1@89.661,-37.458 89.735,-37.458 89.93,-37.263 90.496,-37.263 90.555,-37.322 90.555,-37.618 90.52,-37.618 90.647,-37.744 90.805,-37.744 D16.K@90.805,-37.866 90.983,-37.687 90.983,-37.398 91.055,-37.326 91.138,-37.326 91.603,-37.791 91.836,-37.791 92.314,-38.269 J5.2@93.798,-38.269
USB_HS_D_P: D17.K J5.3 U17.18 | length 11.5
  L1(SIG) w0.1: U17.18@86.651,-38.846 86.921,-38.846 87.046,-38.721 88.508,-38.721 89.129,-38.1 90.723,-38.1 90.928,-37.895 90.928,-37.38 90.553,-37.004 89.896,-37.004 89.725,-36.834 v1(89.662,-36.834)
  L10(SIG) w0.1: v1@89.767,-36.828 89.767,-36.87 89.91,-37.013 90.521,-37.013 90.58,-36.955 90.58,-36.439 90.52,-36.439 90.769,-36.191 D17.K@90.805,-36.191 90.979,-36.364 90.979,-36.826 91.05,-36.897 91.063,-36.897 91.707,-37.541 92.448,-37.541 92.598,-37.691 J5.3@92.598,-37.469
USB_HS_ID: D18.K J5.4 U17.23 | length 10
  L1(SIG) w0.1: U17.23@86.651,-36.346 87.207,-36.346 88.243,-35.31 91.186,-35.31 D18.K@91.215,-35.339 ; D18.K@91.007,-35.187 91.007,-34.723 91.186,-34.544 92.96,-34.544 93.709,-35.292 93.709,-36.579 J5.4@93.798,-36.669
USB_HS_VBUS_FLT: C195.2 D15.K FB7.1 R153.2 | length 11.2
  L1(SIG) w0.635: D15.K@81.36,-42.4 81.36,-43.517 v1(81.407,-43.565)
  L4(SIG) w0.762: v1(81.407,-43.565) 82.128,-42.844 82.357,-42.844 82.39,-42.811 86.326,-42.811 v1(86.981,-42.156) 86.981,-42.015 86.995,-42.002 v1(86.995,-41.406)
  L10(SIG) w0.2: R153.2@88.392,-38.35 88.392,-39.501 88.612,-39.72 88.612,-41.186 88.519,-41.279
USB_ILIM: R157.1 U18.2 | length 3.1
  L1(SIG) w0.254: R157.1@83.558,-45.851 85.598,-45.851 85.858,-45.591 85.858,-44.92 U18.2@85.86,-44.918
USB_NRST: R154.2 U7.D14 U17.27 | length 69.2
  L1(SIG) w0.1: v1(84.836,-31.5) 84.836,-31.594 84.963,-31.721 84.963,-32.508 R154.2@84.955,-32.516
  L1(SIG) w0.2: R154.2@84.953,-32.641 84.953,-35.144 U17.27@84.951,-35.146 84.951,-34.929 U17.27@84.957,-34.923
  L1(SIG) w0.254: U7.D14@44.97,-28.11 44.97,-28.098 45.353,-27.715 v1(45.353,-27.704)
  L6(SIG) w0.1: v1(45.353,-27.704) 44.195,-28.862 44.195,-29.608 44.436,-29.849 44.436,-30.595 44.343,-30.689 44.343,-31.013 44.664,-31.335 47.819,-31.335 48.488,-32.004 48.646,-32.004 48.767,-32.125 50.413,-32.125 51.166,-32.878 59.039,-32.878 59.075,-32.841 65.46,-32.841 65.502,-32.8 73.358,-40.656 75.057,-40.656 75.936,-41.535 82.838,-41.535 84.106,-42.803 86.868,-42.803 88.392,-41.279 88.392,-35.056 v1(84.836,-31.5)
USB_NXT: U7.C15 U17.2 | length 55.6
  L1(SIG) w0.103: v1(45.349,-26.911) 45.36,-26.911 45.759,-27.31 U7.C15@45.77,-27.31 U7.C15@45.799,-27.281 ; v1(79.766,-36.461) 79.772,-36.467 80.908,-36.467 81.029,-36.346 U17.2@81.751,-36.346
  L6(SIG) w0.088: v1(45.349,-26.911) 45.801,-27.363 47.751,-27.363 49.071,-27.339 ccw(c49.07,-27.251) 49.132,-27.313 49.145,-27.299 49.451,-27.299 49.485,-27.333 64.946,-27.363 ; 64.947,-27.363 66.603,-27.363 74.549,-35.31 74.698,-35.31 74.742,-35.31 ccw(c74.742,-35.116) 74.936,-35.116 74.936,-33.178 cw(c75.13,-33.178) 75.13,-32.984 76.978,-32.984 cw(c76.978,-33.178) 77.172,-33.178 cw(c76.978,-33.178) 76.978,-33.372 75.517,-33.372 ccw(c75.517,-33.565) 75.324,-33.565 ccw(c75.517,-33.565) 75.517,-33.759 76.978,-33.759 cw(c76.978,-33.953) 77.172,-33.953 cw(c76.978,-33.953) 76.978,-34.147 75.517,-34.147 ccw(c75.517,-34.341) 75.324,-34.341 ccw(c75.517,-34.341) 75.517,-34.534 76.978,-34.534 cw(c76.978,-34.728) 77.172,-34.728 cw(c76.978,-34.728) 76.978,-34.922 75.517,-34.922 ccw(c75.517,-35.116) 75.324,-35.116 ccw(c75.517,-35.116) 75.517,-35.31 77.216,-35.31 78.232,-35.31 79.383,-36.461 v1(79.766,-36.461)
USB_PHY_RBIAS: R155.1 U17.24 | length 3.1
  L1(SIG) w0.254: U17.24@86.651,-35.846 86.651,-34.765 87.503,-33.913 R155.1@88.273,-33.913
USB_PHY_VBUS: R153.1 U17.22 | length 2.8
  L1(SIG) w0.254: U17.22@86.651,-36.846 86.654,-36.843 87.608,-36.843 87.757,-36.694 v1(87.757,-36.326)
  L10(SIG) w0.254: v1(87.757,-36.326) 88.265,-36.834 88.265,-37.223 R153.1@88.392,-37.35
USB_REFCLK_13MHz: R156.1 U17.26 | length 2.8
  L1(SIG) w0.1: U17.26@85.451,-35.146 85.451,-33.679 85.86,-33.27 R156.1@86.614,-33.27
USB_STP: U7.C13 U17.29 | length 55.4
  L1(SIG) w0.103: U7.C13@44.17,-27.31 44.181,-27.31 44.578,-26.912 v1(44.59,-26.912) ; v1(83.33,-33.151) 83.378,-33.199 83.378,-33.531 83.951,-34.104 U17.29@83.951,-35.146
  L6(SIG) w0.088: v1(44.59,-26.912) 43.673,-26.912 42.176,-25.416 42.176,-24.067 42.085,-23.976 42.085,-23.671 42.176,-23.58 42.176,-22.47 43.159,-21.487 45.72,-21.449 58.577,-21.449 58.636,-21.391 60.748,-21.373 60.768,-21.354 ; 60.768,-21.354 cw(c60.823,-21.422) 60.797,-21.338 cw(c60.824,-21.422) 60.821,-21.334 61.146,-21.331 cw(c61.147,-21.419) 61.206,-21.354 61.475,-21.354 ccw(c61.475,-21.266) 61.508,-21.348 61.541,-21.334 cw(c61.573,-21.415) 61.572,-21.328 65.457,-21.295 65.556,-21.319 ccw(c65.643,-20.96) 65.644,-21.329 65.674,-21.329 71.953,-21.478 73.2,-22.588 cw(c72.955,-22.864) 73.219,-22.606 cw(c72.955,-22.864) 73.221,-22.608 v1(83.33,-33.151)
VCFG: R76.2 U7.D8 | length 6.6
  L1(SIG) w0.1: U7.D8@40.17,-28.11 40.17,-28.098 40.57,-27.698 v1(40.57,-27.687)
  L8(SIG) w0.1: v1(40.57,-27.687) 40.57,-27.289 41.41,-26.449 41.41,-24.647 42.166,-23.891 42.387,-23.891 v1(42.454,-23.824)
  L10(SIG) w0.1: R76.2@41.481,-24.324 41.481,-24.251 41.716,-24.016 42.221,-24.016 42.413,-23.824 v1(42.454,-23.824)
VTT_VDDQ: C25.2 R20.1 U5.5 | length 3.4
  L1(SIG) w0.254: U5.5@21.418,-7.665 21.471,-7.612 C25.2@21.471,-5.973 21.446,-5.948 21.446,-5.136 21.471,-5.111 R20.1@21.471,-4.322
VUSB_Filtered: C94.2 D7.A FB4.2 R45.2 | length 35.8
  L10(SIG) w0.2: R45.2@69.217,-38.215 69.284,-38.282 69.284,-40.293 70.206,-41.215 72.58,-41.215 76.663,-45.297 82.331,-45.297 84.767,-47.733 85.194,-47.733 87.63,-50.169 87.63,-56.273 87.588,-56.315 87.588,-57.219 87.822,-57.454 87.938,-57.454 C94.2@88.146,-57.662
  L10(SIG) w0.5: C94.2@88.146,-57.662 88.15,-57.658 89.539,-57.658 FB4.2@89.543,-57.662 89.52,-57.685 89.52,-59.707 D7.A@89.496,-59.73
pads on no net: J3.4 J4.1 J4.MH J6.21 J6.23 J6.39 J6.63 J6.65 J6.78 J6.MH J7.MH U1.5 U3.5 U4.5 U6.5 U7.A20 U7.B19 U7.B20 U7.C20 U7.D19 U7.D20 U7.F19 U7.F20 U7.G14 U7.G15 U7.G19 U7.G20 U7.H15 U7.H20 U7.J8 U7.J12 U7.J19 U7.J20 U7.K16 U7.K18 U7.K19 U7.L7 U7.L16 U7.N15 U7.N16 U7.N17 U7.N18 U7.P14 U7.P15 U7.P16 U7.P18 U7.P19 U7.R14 U7.R16 U7.R17 U7.R18 U7.R19 U7.T5 U7.T9 U7.T10 U7.T11 U7.T14 U7.T15 U7.T16 U7.T17 U7.T19 U7.U5 U7.U7 U7.U8 U7.U9 U7.U10 U7.U12 U7.U17 U7.U18 U7.U19 U7.V5 U7.V6 U7.V7 U7.V8 U7.V10 U7.V11 U7.V13 U7.V17 U7.V18 U7.W6 U7.W8 U7.W9 U7.W10 U7.W11 U7.Y6 U7.Y7 U7.Y8 U7.Y9 U7.Y11 U7.Y12 U7.Y13 U8.3 U8.21 U8.23 U8.24 U8.26 U8.27 U8.28 U8.29 U8.30 U8.32 U8.33 U8.34 U8.36 U8.40 U8.41 U8.43 U8.44 U8.45 U8.46 U8.48 U8.52 U8.53 U8.57 U8.58 U8.59 U8.60 U9.6 U9.7 U11.1 U12.A1 U12.A2 U12.A7 U12.A8 U12.A9 U12.A10 U12.A11 U12.A12 U12.A13 U12.A14 U12.B3 U12.B4 U12.B5 U12.B6 U12.B7 U12.B8 U12.B9 U12.B10 U12.B11 U12.B12 U12.B13 U12.B14 U12.C3 U12.C5 U12.C7 U12.C8 U12.C9 U12.C10 U12.C11 U12.C12 U12.C13 U12.C14 U12.D1 U12.D2 U12.D3 U12.D4 U12.D12 U12.D13 U12.D14 U12.E1 U12.E2 U12.E3 U12.E5 U12.E8 U12.E9 U12.E10 U12.E12 U12.E13 U12.E14 U12.F1 U12.F2 U12.F3 U12.F10 U12.F12 U12.F13 U12.F14 U12.G1 U12.G2 U12.G3 U12.G10 U12.G12 U12.G13 U12.G14 U12.H1 U12.H2 U12.H3 U12.H5 U12.H12 U12.H13 U12.H14 U12.J1 U12.J2 U12.J3 U12.J12 U12.J13 U12.J14 U12.K1 U12.K2 U12.K3 U12.K6 U12.K7 U12.K10 U12.K12 U12.K13 U12.K14 U12.L1 U12.L2 U12.L3 U12.L12 U12.L13 U12.L14 U12.M1 U12.M2 U12.M3 U12.M7 U12.M8 U12.M9 U12.M10 U12.M11 U12.M12 U12.M13 U12.M14 U12.N1 U12.N3 U12.N6 U12.N7 U12.N8 U12.N9 U12.N10 U12.N11 U12.N12 U12.N13 U12.N14 U12.P2 U12.P7 U12.P8 U12.P9 U12.P10 U12.P11 U12.P12 U12.P13 U12.P14 U13.1 U14.J1 U14.J9 U14.L1 U14.L9 U14.M7 U15.J1 U15.J9 U15.L1 U15.L9 U15.M7 U17.12 U17.15 U17.16 U17.25 U18.3

## Polygon pours and split planes (outlines as drawn)
CGND on L1(SIG) "GROUND RING L1" (solid, remove dead copper, pour order 134): 89.406,-70.485 99.383,-70.485 ccw(c99.384,-68.965) 100.904,-68.965 100.904,-13.081 100.457,-13.081 100.457,-1.074 ccw(c98.937,-1.074) 98.937,0.447 88.138,0.447 1.52,0.447 ccw(c1.52,-1.073) 0,-1.073 0,-1.074 0,-8.255 -0.193,-8.255 -0.193,-68.714 -0.193,-68.715 ccw(c1.327,-68.715) 1.328,-70.235 87.887,-70.235 87.882,-67.695 11.218,-67.695 cw(c13.387,-64.071) 9.589,-65.917 9.588,-63.377 ccw(c7.048,-63.377) 7.048,-60.837 4.127,-60.837 cw(c4.032,-59.09) 3.312,-60.684 3.242,-10.083 cw(c6.163,-13.133) 4.318,-9.335 6.858,-9.335 ccw(c6.858,-6.794) 9.398,-6.794 9.398,-3.873 cw(c11.144,-3.778) 9.551,-3.058 90.818,-2.946 cw(c89.154,-3.873) 91.059,-3.873 91.059,-6.795 ccw(c93.599,-6.794) 93.599,-9.335 96.139,-9.335 cw(c94.295,-13.132) 97.446,-10.323 97.446,-17.143 97.465,-17.143 97.465,-60.448 cw(c95.717,-58.964) 96.584,-61.087 93.662,-61.087 ccw(c93.663,-63.627) 91.123,-63.627 91.122,-66.167 cw(c87.324,-64.322) 89.493,-67.945 89.411,-67.945
+5V on L1(SIG) "+5V_L01_P011" (solid, remove dead copper, pour order 11): 62.103,-58.043 62.103,-60.456 61.341,-61.218 58.801,-61.218 58.603,-61.091 58.603,-59.313 57.404,-59.313 57.404,-58.043
+3V3 on L1(SIG) "+3V3_L01_P053" (solid, remove dead copper, pour order 53): 86.246,-37.216 86.246,-38.014 88.094,-38.014 88.139,-37.969 88.139,-37.216
+1V8 on L1(SIG) "+1V8_L01_P054" (solid, remove dead copper, pour order 54): 82.578,-34.745 81.674,-34.745 81.674,-35.551 82.583,-35.551
GND on L1(SIG) "GND_L01_P048" (solid, remove dead copper, pour order 48): 3.813,-33.405 3.813,-36.773 7.938,-36.773 8.255,-36.456 8.255,-33.916 7.744,-33.405
+1V35 on L1(SIG) "+1V35_L01_P047" (solid, remove dead copper, pour order 47): 3.619,-29.912 3.619,-33.151 8.001,-33.151 8.509,-32.643 8.509,-30.484 7.938,-29.912
GND on L1(SIG) "GND_L01_P037" (solid, remove dead copper, pour order 37): 23.622,-14.736 25.019,-14.736 25.25,-14.504 25.25,-10.702 24.982,-10.434 23.529,-10.434 23.25,-10.713 23.25,-14.438
GND on L1(SIG) "GND_L01_P045" (solid, remove dead copper, pour order 45): 42.545,-30.992 40.386,-33.151 40.005,-33.151 39.497,-32.643 39.243,-32.643 38.989,-32.897 38.989,-33.024 39.116,-33.024 41.656,-35.564 41.91,-35.564 43.688,-33.786 43.688,-33.659
GND on L1(SIG) "GND_L01_P036" (solid, remove dead copper, pour order 36): 18.542,-6.399 18.542,-5.061 18.32,-4.839 13.984,-4.839 13.716,-5.106 13.716,-6.331 14.002,-6.617 18.368,-6.617
+5V on L1(SIG) "+5V_L01_P035" (solid, remove dead copper, pour order 35): 18.669,-9.193 18.669,-7.855 18.447,-7.633 14.111,-7.633 13.843,-7.9 13.843,-9.125 14.129,-9.411 18.495,-9.411
+0V675 on L1(SIG) "+0V675_L01_P034" (solid, remove dead copper, pour order 34): 20.415,-15.371 22.352,-15.371 22.759,-14.964 22.759,-11.227 22.056,-10.525 20.456,-10.525 19.965,-11.016 19.965,-15.01
GND on L1(SIG) "GND_L01_P019" (solid, remove dead copper, pour order 19): 55.008,-58.762 55.05,-58.805 55.753,-58.805 55.95,-58.607 56.712,-58.607 56.896,-58.424 56.896,-56.646 56.442,-56.292 55.91,-56.788 54.991,-57.662 54.991,-57.789
+5V on L1(SIG) "+5V_L01_P014" (solid, remove dead copper, pour order 14): 22.987,-58.74 22.987,-57.408 23.368,-57.027 27.813,-57.027 27.813,-58.932 27.369,-59.375 23.69,-59.375 23.504,-59.248 23.493,-58.94
+5V on L1(SIG) "+5V_L01_P012" (solid, remove dead copper, pour order 12): 79.883,-58.043 79.883,-59.809 79.776,-59.916 75.983,-59.916 75.874,-59.841 75.857,-59.353 74.917,-59.353 74.917,-58.043
GND on L1(SIG) "GND_L01_P020" (solid, remove dead copper, pour order 20): 72.521,-58.91 72.563,-58.952 73.266,-58.952 73.463,-58.755 74.225,-58.755 74.803,-58.177 74.803,-56.392 74.369,-56.054 73.423,-56.936 72.504,-57.809 72.504,-57.936
GND on L1(SIG) "GND_L01_P018" (solid, remove dead copper, pour order 18): 21.908,-50.083 21.908,-56.052 22.502,-56.646 27.918,-56.646 28.512,-56.052 28.512,-54.872 23.469,-49.829 22.289,-49.829
GND on L1(SIG) "GND_L01_P017" (solid, remove dead copper, pour order 17): 74.302,-50.591 74.302,-56.56 74.683,-56.941 80.525,-56.941 80.906,-56.56 80.906,-55.38 75.863,-50.337 74.683,-50.337
GND on L1(SIG) "GND_L01_P016" (solid, remove dead copper, pour order 16): 56.395,-50.721 56.395,-56.69 56.776,-57.071 62.618,-57.071 62.999,-56.69 62.999,-55.256 58.21,-50.467 56.776,-50.467
GND on L1(SIG) "GND_L01_P015" (solid, remove dead copper, pour order 15): 39.885,-50.34 39.885,-56.526 40.259,-56.9 45.899,-56.9 46.489,-56.309 46.489,-55.129 41.446,-50.086 40.266,-50.086
+5V on L1(SIG) "+5V_L01_P013" (solid, remove dead copper, pour order 13): 40.63,-58.74 40.63,-58.154 41.186,-57.597 45.329,-57.597 45.329,-60.084 44.831,-60.583 42.545,-60.583 41.611,-59.946 41.57,-58.761 41.519,-58.74
+3V3 on L1(SIG) "+3V3_L01_P010" (solid, remove dead copper, pour order 10): 66.802,-50.445 66.802,-56.414 67.183,-56.795 73.025,-56.795 73.406,-56.414 73.406,-50.699 72.898,-50.191 67.183,-50.191
+1V8 on L1(SIG) "+1V8_L01_P009" (solid, remove dead copper, pour order 9): 49.063,-50.542 49.063,-56.511 49.444,-56.892 55.286,-56.892 55.667,-56.511 55.667,-50.796 55.159,-50.288 49.444,-50.288
+1V35 on L1(SIG) "+1V35_L01_P008" (solid, remove dead copper, pour order 8): 14.512,-50.087 14.512,-56.056 14.893,-56.437 20.735,-56.437 21.116,-56.056 21.116,-50.341 20.608,-49.833 14.893,-49.833
+1V0 on L1(SIG) "+1V0_L01_P007" (solid, remove dead copper, pour order 7): 32.512,-50.169 32.512,-56.138 32.893,-56.519 38.735,-56.519 39.116,-56.138 39.116,-50.423 38.608,-49.915 32.893,-49.915
SW_1V35 on L1(SIG) "SW_1V35_L01_P005" (solid, remove dead copper, pour order 5): 14.427,-57.825 18.069,-57.825 18.623,-58.379 20.003,-58.379 20.003,-58.611 19.989,-58.625 18.868,-58.625 18.198,-59.73 14.451,-59.73
SW_1V0 on L1(SIG) "SW_1V0_L01_P004" (solid, remove dead copper, pour order 4): 32.51,-59.564 32.51,-58.045 32.729,-57.825 36.151,-57.825 36.706,-58.379 38.085,-58.379 38.085,-58.611 38.071,-58.625 36.951,-58.625 36.227,-59.821 32.766,-59.821
SW_3V3 on L1(SIG) "SW_3V3_L01_P003" (solid, remove dead copper, pour order 3): 66.796,-58.418 70.438,-58.418 70.992,-58.972 72.372,-58.972 72.372,-59.203 72.358,-59.217 71.238,-59.217 70.568,-60.323 66.82,-60.323
SW_1V8 on L1(SIG) "SW_1V8_L01_P001" (solid, remove dead copper, pour order 1): 49.284,-58.27 52.925,-58.27 53.479,-58.824 54.859,-58.824 54.859,-59.056 54.845,-59.07 53.725,-59.07 53.055,-60.176 49.307,-60.176
CGND on L9(GND) "GROUND RING L9" (solid, remove dead copper, pour order 108): 89.406,-70.485 99.383,-70.485 ccw(c99.384,-68.965) 100.904,-68.965 100.904,-13.081 100.457,-13.081 100.457,-1.074 ccw(c98.937,-1.074) 98.937,0.447 88.138,0.447 1.52,0.447 ccw(c1.52,-1.073) 0,-1.073 0,-1.074 0,-8.255 -0.193,-8.255 -0.193,-68.714 -0.193,-68.715 ccw(c1.327,-68.715) 1.328,-70.235 89.156,-70.235 89.151,-67.695 11.218,-67.695 cw(c13.387,-64.071) 9.589,-65.917 9.588,-63.377 ccw(c7.049,-63.377) 7.048,-60.837 4.127,-60.837 cw(c4.032,-59.09) 3.312,-60.684 3.242,-10.083 cw(c6.163,-13.132) 4.318,-9.335 6.858,-9.335 ccw(c6.858,-6.794) 9.398,-6.794 9.398,-3.873 cw(c11.144,-3.778) 9.551,-3.058 90.818,-2.946 cw(c89.155,-3.873) 91.059,-3.873 91.059,-6.795 ccw(c93.599,-6.794) 93.599,-9.335 96.139,-9.335 cw(c94.295,-13.131) 97.446,-10.323 97.446,-17.143 97.465,-17.143 97.465,-60.448 cw(c95.717,-58.964) 96.584,-61.087 93.662,-61.087 ccw(c93.662,-63.627) 91.123,-63.627 91.122,-66.167 cw(c87.324,-64.322) 89.493,-67.945 89.411,-67.945
GND on L9(GND) "Ground plane L9" (solid, remove dead copper, pour order 129): -0.012,-69.121 -0.012,-2.103 -0.012,-1.647 cw(c1.509,-1.647) 1.509,-0.127 98.923,-0.127 cw(c98.923,-1.647) 100.444,-1.647 100.444,-69.121 cw(c98.923,-69.121) 98.923,-70.641 1.509,-70.641 cw(c1.509,-69.121)
CGND on L10(SIG) "GROUND RING L10" (solid, remove dead copper, pour order 128): 89.406,-70.485 99.383,-70.485 ccw(c99.384,-68.965) 100.904,-68.965 100.904,-13.081 100.457,-13.081 100.457,-1.074 ccw(c98.937,-1.074) 98.937,0.447 88.138,0.447 1.52,0.447 ccw(c1.52,-1.073) 0,-1.073 0,-1.074 0,-8.255 -0.193,-8.255 -0.193,-68.714 -0.193,-68.715 ccw(c1.327,-68.715) 1.328,-70.235 87.887,-70.235 87.883,-67.697 11.222,-67.697 cw(c13.387,-64.071) 9.589,-65.917 9.588,-63.377 ccw(c7.049,-63.377) 7.048,-60.837 4.127,-60.837 cw(c4.032,-59.09) 3.312,-60.684 3.242,-10.083 cw(c6.163,-13.132) 4.318,-9.335 6.858,-9.335 ccw(c6.858,-6.794) 9.398,-6.794 9.398,-3.873 cw(c11.144,-3.778) 9.551,-3.058 90.818,-2.946 cw(c89.155,-3.873) 91.059,-3.873 91.059,-6.795 ccw(c93.599,-6.795) 93.599,-9.335 96.139,-9.335 cw(c94.296,-13.13) 97.446,-10.323 97.446,-17.143 97.465,-17.143 97.465,-60.448 cw(c95.717,-58.964) 96.584,-61.087 93.662,-61.087 ccw(c93.662,-63.627) 91.123,-63.627 91.122,-66.167 cw(c87.325,-64.322) 89.493,-67.945 89.411,-67.945
GND on L10(SIG) "GND_L10_P074" (solid, remove dead copper, pour order 74): 4.572,-52.709 4.572,-47.756 6.731,-47.756 7.62,-48.645 7.62,-52.709
GND on L10(SIG) "GND_L10_P058" (solid, remove dead copper, pour order 58): 30.353,-64.266 30.353,-62.107 30.226,-61.98 26.289,-61.98 26.162,-62.107 26.162,-64.012 26.543,-64.393 30.226,-64.393
+1V8 on L10(SIG) "+1V8_L10_P059" (solid, remove dead copper, pour order 59): 26.224,-59.481 26.224,-61.64 26.351,-61.767 30.288,-61.767 30.415,-61.64 30.415,-59.735 30.034,-59.354 26.351,-59.354
USB_HS_VBUS_FLT on L10(SIG) "USB_HS_VBUS_FLT_L10_P057" (solid, remove dead copper, pour order 57): 89.789,-41.025 86.741,-41.025 86.614,-41.152 86.614,-42.295 86.741,-42.422 87.376,-42.422 87.501,-42.295 87.501,-41.855 87.618,-41.738 89.789,-41.738 89.931,-41.611 89.916,-41.152
GND on L10(SIG) "GND_L10_P052" (solid, remove dead copper, pour order 52): 82.042,-35.659 82.042,-39.532 82.846,-40.136 85.852,-40.136 86.487,-39.659 86.487,-35.786 85.852,-35.31 82.508,-35.31
GND on L10(SIG) "GND_L10_P046" (solid, remove dead copper, pour order 46): 69.469,-17.276 69.469,-21.34 74.168,-21.34 74.168,-17.276
+0V675 on L10(SIG) "+0V675_L10_P038" (solid, remove dead copper, pour order 38): 22.733,-14.744 19.86,-14.744 19.834,-18.038 9.97,-18.038 9.97,-34.929 11.176,-34.929 11.176,-19.435 22.733,-19.435
+1V8 on L10(SIG) "+1V8_L10_P041" (solid, remove dead copper, pour order 41): 41.005,-35.734 41.005,-36.817 41.304,-37.041 41.956,-37.041 42.545,-36.453 42.545,-35.661 42.32,-35.435 41.304,-35.435
GND on L10(SIG) "GND_L10_P040" (solid, remove dead copper, pour order 40): 29.881,-55.918 29.881,-46.67 29.316,-46.105 27.272,-46.105 25.781,-47.595 25.781,-56.265 29.336,-56.265
+1V0 on L10(SIG) "+1V0_L10_P039" (solid, remove dead copper, pour order 39): 30.571,-46.451 30.571,-55.699 31.079,-56.207 33.238,-56.207 36.54,-52.905 36.54,-49.476 33.238,-46.174 31.006,-46.174
+VCC on L10(SIG) "+VCC_L10_P030" (solid, remove dead copper, pour order 30): 83.947,-61.472 83.947,-62.615 ccw(c84.201,-62.615) 84.201,-62.869 90.17,-62.869 90.17,-61.345 84.074,-61.345 ccw(c84.074,-61.472)
+5V on L10(SIG) "+5V_L10_P026" (solid, remove dead copper, pour order 26): 77.47,-60.71 80.391,-60.71 81.026,-61.345 82.042,-61.345 82.169,-61.472 82.169,-62.742 82.042,-62.869 77.47,-62.869 77.089,-62.488 77.089,-61.218
GND on L10(SIG) "GND_L10_P027" (solid, remove dead copper, pour order 27): 77.559,-59.879 81.191,-59.879 81.641,-60.329 83.566,-60.329 83.858,-60.036 83.858,-57.974 83.292,-57.408 81.757,-57.408 81.153,-57.789 77.597,-57.789 77.127,-58.258 77.127,-59.371
+VDC on L10(SIG) "+VDC_L10_P024" (solid, remove dead copper, pour order 24): 85.019,-49.574 85.654,-49.574 cw(c85.654,-50.844) 86.924,-50.844 86.924,-58.718 ccw(c87.051,-58.718) 87.051,-58.845 87.94,-58.845 cw(c87.94,-59.353) 88.448,-59.353 88.448,-60.115 cw(c87.94,-60.115) 87.94,-60.623 84.638,-60.623 cw(c84.638,-60.115) 84.338,-60.524 84.338,-50.45
GND on L8(SIG) "GND_L08_P149" (solid, remove dead copper, pour order 149): 0.004,-68.965 0.004,-1.947 0.004,-1.491 cw(c1.524,-1.491) 1.524,0.029 98.939,0.029 cw(c98.939,-1.491) 100.459,-1.491 100.459,-68.965 cw(c98.939,-68.965) 98.939,-70.485 1.524,-70.485 cw(c1.524,-68.965)
+VCC on L8(SIG) "+VCC_L08_P140" (solid, remove dead copper, pour order 140): 61.214,-59.69 61.214,-64.516 85.598,-64.516 86.868,-63.246 86.868,-59.69
CGND on L8(SIG) "L8(SIG)-CGND" (solid, remove dead copper, pour order 120): 89.406,-70.485 99.383,-70.485 ccw(c99.384,-68.965) 100.904,-68.965 100.904,-13.081 100.457,-13.081 100.457,-1.074 ccw(c98.937,-1.074) 98.937,0.447 88.138,0.447 1.52,0.447 ccw(c1.52,-1.073) 0,-1.073 0,-1.074 0,-8.255 -0.193,-8.255 -0.193,-68.714 -0.193,-68.715 ccw(c1.327,-68.715) 1.328,-70.235 87.887,-70.235 87.882,-67.695 11.218,-67.695 cw(c13.387,-64.071) 9.589,-65.917 9.588,-63.377 ccw(c7.048,-63.377) 7.048,-60.837 4.127,-60.837 cw(c4.032,-59.09) 3.312,-60.684 3.242,-10.083 cw(c6.163,-13.133) 4.318,-9.335 6.858,-9.335 ccw(c6.858,-6.794) 9.398,-6.794 9.398,-3.873 cw(c11.144,-3.778) 9.551,-3.058 90.818,-2.946 cw(c89.154,-3.873) 91.059,-3.873 91.059,-6.795 ccw(c93.599,-6.794) 93.599,-9.335 96.139,-9.335 cw(c94.295,-13.132) 97.446,-10.323 97.446,-17.143 97.465,-17.143 97.465,-60.448 cw(c95.717,-58.964) 96.584,-61.087 93.662,-61.087 ccw(c93.663,-63.627) 91.123,-63.627 91.122,-66.167 cw(c87.324,-64.322) 89.493,-67.945 89.411,-67.945
+1V0 on L3(PWR) "+1V0_L03_P066" (solid, remove dead copper, pour order 66): 39.318,-30.622 37.846,-30.905 37.846,-43.067 35.791,-45.466 30.226,-45.466 30.226,-53.086 31.444,-54.304 36.957,-54.304 41.643,-44.592 39.37,-39.501 41.643,-37.592 44.087,-36.691 44.165,-33.723 44.165,-30.988 44.165,-30.53
CGND on L3(PWR) "L3(PWR)-CGND" (solid, remove dead copper, pour order 136): 89.406,-70.485 99.383,-70.485 ccw(c99.384,-68.965) 100.459,-67.891 100.459,-13.081 100.457,-13.081 100.457,-1.074 ccw(c98.937,-1.074) 98.937,0.447 1.52,0.447 ccw(c1.52,-1.073) 0,-1.073 0,-1.074 0,-8.255 -0.193,-8.255 -0.193,-68.714 -0.193,-68.715 ccw(c1.327,-68.715) 1.328,-70.235 87.887,-70.235 87.882,-67.695 11.218,-67.695 cw(c13.387,-64.071) 9.589,-65.917 9.588,-63.377 ccw(c7.048,-63.377) 7.048,-60.837 4.127,-60.837 cw(c4.032,-59.09) 3.312,-60.684 3.242,-10.083 cw(c6.163,-13.133) 4.318,-9.335 6.858,-9.335 ccw(c6.858,-6.794) 9.398,-6.794 9.398,-3.873 cw(c11.144,-3.778) 9.551,-3.058 90.818,-2.946 cw(c89.154,-3.873) 91.059,-3.873 91.059,-6.795 ccw(c93.599,-6.794) 93.599,-9.335 96.139,-9.335 cw(c94.295,-13.132) 97.446,-10.323 97.446,-16.768 96.075,-16.768 93.808,-14.5 93.808,-13.704 89.505,-9.402 86.419,-9.402 86.419,-27.875 86.614,-28.071 89.886,-28.071 92.759,-25.198 92.759,-24.339 96.139,-20.959 96.262,-21.082 97.465,-21.082 97.465,-60.448 cw(c95.717,-58.964) 96.584,-61.087 93.662,-61.087 ccw(c93.663,-63.627) 91.123,-63.627 91.122,-66.167 cw(c87.324,-64.322) 89.493,-67.945 89.411,-67.945
GND on L3(PWR) "GND_L03_P146" (solid, remove dead copper, pour order 146): 58.674,-49.53 58.928,-49.784 58.928,-67.564 94.488,-67.564 98.552,-63.5 98.552,-49.53
+5V on L3(PWR) "L3(PWR)-+5V" (solid, remove dead copper, pour order 138): 2.413,-7.624 2.413,-67.564 87.757,-67.564 87.757,-57.281 76.962,-57.281 76.623,-58.297 28.829,-58.297 27.178,-56.646 5.715,-56.646 5.715,-10.587 18.923,-10.587 18.923,-7.624
+3V3 on L3(PWR) "+3V3_L03_P144" (solid, remove dead copper, pour order 144): 22.055,-2.276 21.733,-18.667 38.509,-38.562 39.579,-54.248 43.18,-62.22 56.198,-62.22 64.611,-53.076 96.985,-53.076 96.985,-2.276
+1V35 on L3(PWR) "L3(PWR)-+1V35" (solid, remove dead copper, pour order 69): 5.334,-56.642 26.095,-56.642 26.198,-54.301 32.052,-54.301 38.354,-45.466 39.83,-43.99 39.722,-34.858 39.751,-22.483 29.464,-22.483 21.717,-14.736 21.844,-14.609 21.844,-3.941 23.114,-3.941 23.368,-3.687 23.368,-2.671 19.431,-2.671 17.653,-4.449 17.653,-7.545 18.923,-7.545 18.923,-9.021 17.659,-10.678 17.653,-10.672 5.334,-10.672
+1V8 on L3(PWR) "+1V8_L03_P051" (solid, remove dead copper, pour order 51): 31.242,-56.395 31.242,-61.98 26.416,-61.98 25.527,-61.091 26.162,-60.456 26.162,-56.395
+1V8 on L3(PWR) "+1V8_L03_P131" (solid, remove dead copper, pour order 131): 32.3,-54.353 26.144,-54.353 26.144,-58.448 47.48,-58.448 55.1,-50.828 55.1,-40.771 85.344,-40.771 93.327,-32.788 93.327,-31.269 88.755,-31.269 88.755,-33.681 84.501,-33.681 84.501,-32.34 82.551,-32.34 82.563,-33.681 63.474,-33.568 63.474,-29.111 55.1,-29.111 47.353,-22.507 41.687,-21.798 40.016,-28.669 33.51,-22.507 26.144,-29.873
+1V8 on L3(PWR) "+1V8_L03_P063" (solid, remove dead copper, pour order 63): 40.64,-28.96 40.259,-29.341 40.259,-31.246 41.148,-32.135 41.529,-32.135 41.529,-31.119 42.164,-30.484 43.307,-30.484 43.307,-29.849 42.418,-28.96 42.418,-28.833
GND on L4(SIG) "GND_L04_P147" (solid, remove dead copper, pour order 147): 0.004,-68.965 0.004,-1.947 0.004,-1.491 cw(c1.524,-1.491) 1.524,0.029 98.939,0.029 cw(c98.939,-1.491) 100.459,-1.491 100.459,-68.965 cw(c98.939,-68.965) 98.939,-70.485 1.524,-70.485 cw(c1.524,-68.965)
+3V3 on L4(SIG) "+3V3_L04_P139" (solid, remove dead copper, pour order 139): 36.83,-32.766 36.83,-41.148 49.159,-41.148 49.022,-37.592 40.752,-37.707 38.894,-32.766
CGND on L4(SIG) "GROUND RING L4" (solid, remove dead copper, pour order 125): 89.406,-70.485 99.383,-70.485 ccw(c99.384,-68.965) 100.904,-68.965 100.904,-13.081 100.457,-13.081 100.457,-1.074 ccw(c98.937,-1.074) 98.937,0.447 88.138,0.447 1.52,0.447 ccw(c1.52,-1.073) 0,-1.073 0,-1.074 0,-8.255 -0.193,-8.255 -0.193,-68.714 -0.193,-68.715 ccw(c1.327,-68.715) 1.328,-70.235 87.887,-70.235 87.882,-67.695 11.218,-67.695 cw(c13.387,-64.071) 9.589,-65.917 9.588,-63.377 ccw(c7.048,-63.377) 7.048,-60.837 4.127,-60.837 cw(c4.032,-59.09) 3.312,-60.684 3.242,-10.083 cw(c6.163,-13.133) 4.318,-9.335 6.858,-9.335 ccw(c6.858,-6.794) 9.398,-6.794 9.398,-3.873 cw(c11.144,-3.778) 9.551,-3.058 90.818,-2.946 cw(c89.154,-3.873) 91.059,-3.873 91.059,-6.795 ccw(c93.599,-6.794) 93.599,-9.335 96.139,-9.335 cw(c94.295,-13.132) 97.446,-10.323 97.446,-17.143 97.465,-17.143 97.465,-60.448 cw(c95.717,-58.964) 96.584,-61.087 93.662,-61.087 ccw(c93.663,-63.627) 91.123,-63.627 91.122,-66.167 cw(c87.324,-64.322) 89.493,-67.945 89.411,-67.945
+1V0_ETH on L4(SIG) "+1V0_ETH_L04_P064" (solid, remove dead copper, pour order 64): 68.961,-17.022 67.945,-17.022 67.691,-17.276 67.691,-18.8 70.739,-21.848 69.723,-22.864 64.897,-22.864 64.897,-25.15 74.041,-25.15 77.216,-21.975 77.216,-17.657 76.454,-16.895
+1V8_ETH on L4(SIG) "+1V8_ETH_L04_P065" (solid, remove dead copper, pour order 65): 62.103,-11.053 62.103,-24.896 63.373,-26.166 70.358,-26.166 74.612,-21.911 74.612,-11.116 73.85,-10.354 73.85,-10.227 62.928,-10.227
+1V8_FTDI on L4(SIG) "+1V8_FTDI_L04_P056" (solid, remove dead copper, pour order 56): 58.293,-36.834 58.293,-47.629 60.071,-49.407 74.422,-49.407 76.327,-47.502 76.327,-36.58 75.057,-35.31 59.69,-35.437
CGND on L2(GND) "GROUND RING L2" (solid, remove dead copper, pour order 133): 89.406,-70.485 99.383,-70.485 ccw(c99.384,-68.965) 100.904,-68.965 100.904,-13.081 100.457,-13.081 100.457,-1.074 ccw(c98.937,-1.074) 98.937,0.447 88.138,0.447 1.52,0.447 ccw(c1.52,-1.073) 0,-1.073 0,-1.074 0,-8.255 -0.193,-8.255 -0.193,-68.714 -0.193,-68.715 ccw(c1.327,-68.715) 1.328,-70.235 87.887,-70.235 87.882,-67.695 11.218,-67.695 cw(c13.387,-64.071) 9.589,-65.917 9.588,-63.377 ccw(c7.048,-63.377) 7.048,-60.837 4.127,-60.837 cw(c4.032,-59.09) 3.312,-60.684 3.242,-10.083 cw(c6.163,-13.133) 4.318,-9.335 6.858,-9.335 ccw(c6.858,-6.794) 9.398,-6.794 9.398,-3.873 cw(c11.144,-3.778) 9.551,-3.058 90.818,-2.946 cw(c89.154,-3.873) 91.059,-3.873 91.059,-6.795 ccw(c93.599,-6.794) 93.599,-9.335 96.139,-9.335 cw(c94.295,-13.132) 97.446,-10.323 97.446,-17.143 97.465,-17.143 97.465,-60.448 cw(c95.717,-58.964) 96.584,-61.087 93.662,-61.087 ccw(c93.663,-63.627) 91.123,-63.627 91.122,-66.167 cw(c87.324,-64.322) 89.493,-67.945 89.411,-67.945